# Altium PCB ArduinoShieldADC.PcbDoc
Units mil, origin at the board's own origin, x right, y up, seen from the top; angles counter-clockwise.
Board outline 3560 x 2100 mil, 2 copper layers (Component Side, Bottom Layer), stack 12.8 mil thick; 44 components, 42 nets, 247 pads, 7 vias.
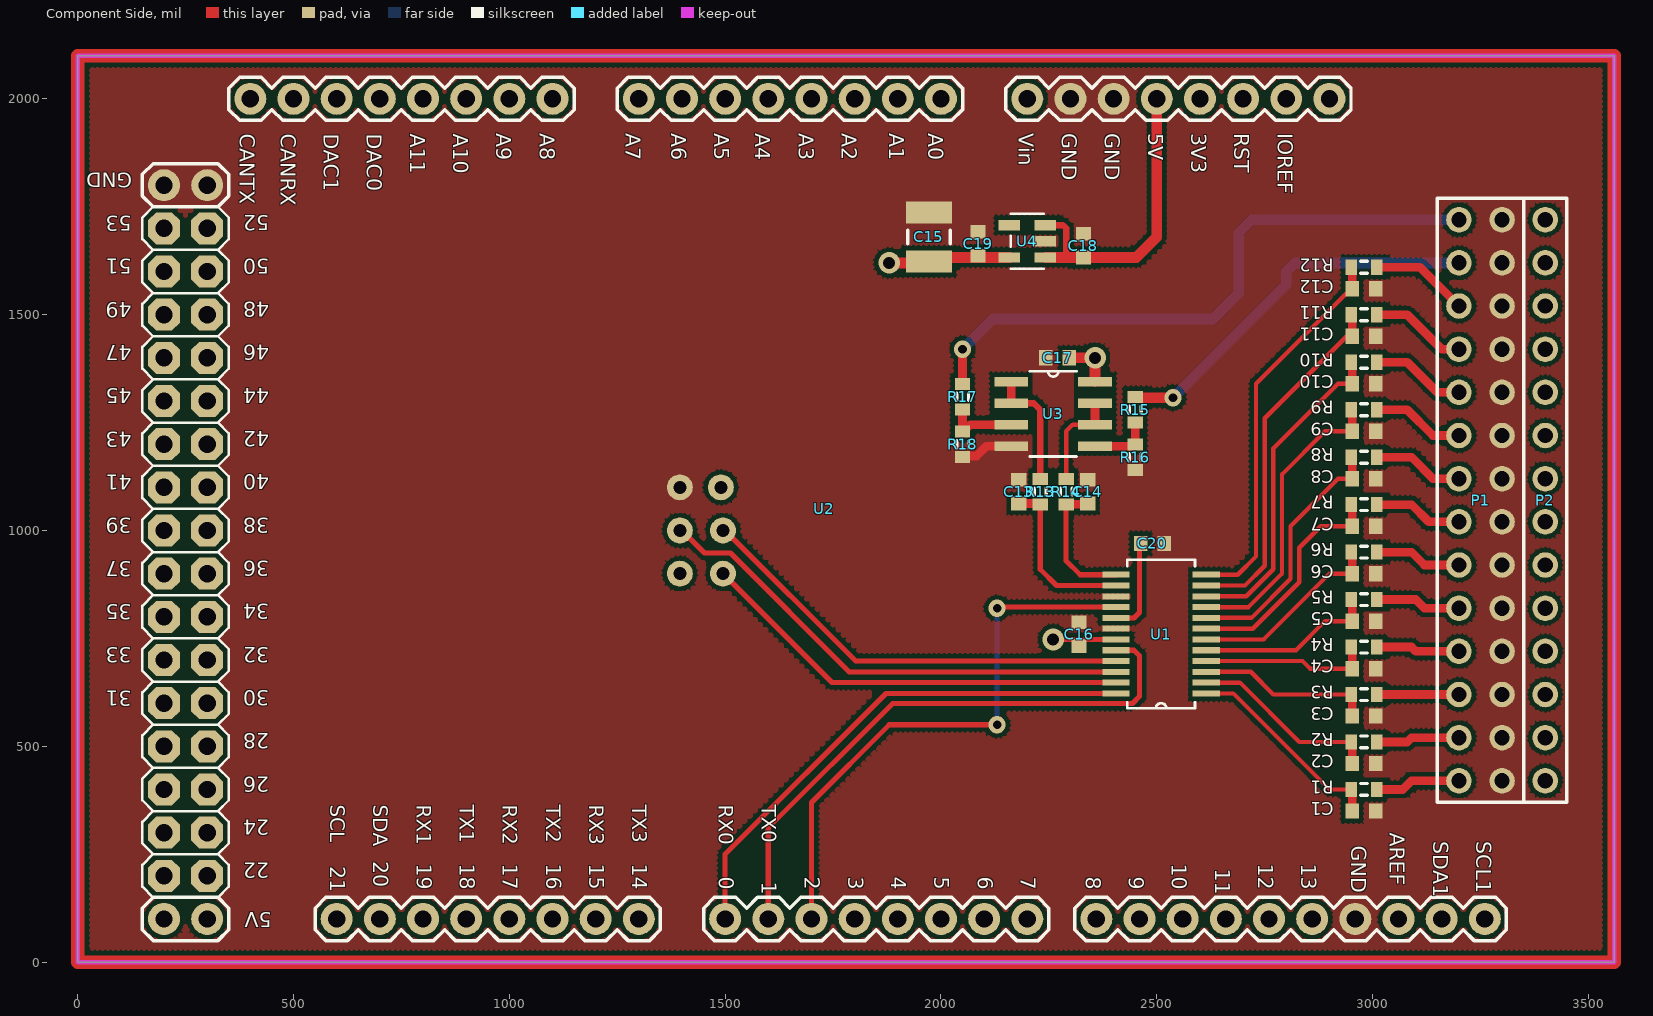
[diagram p0: Component Side view]
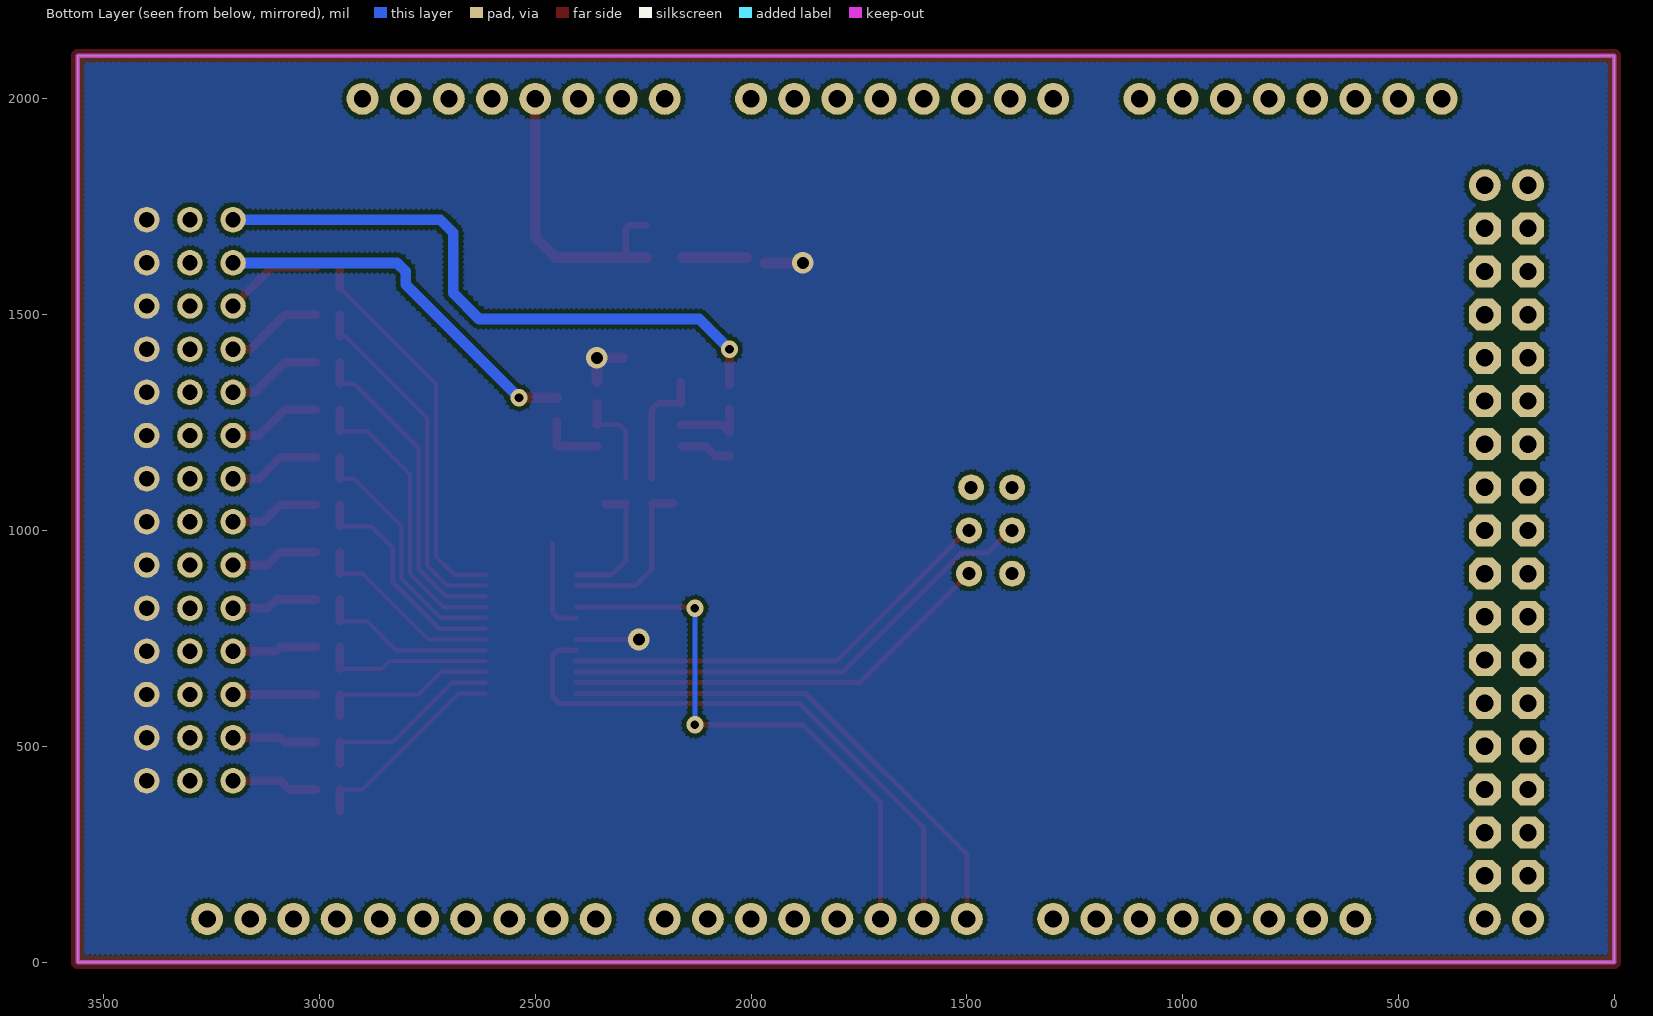
[diagram p1: Bottom Layer view, seen from below]

## Layer stack, top to bottom
Top Solder: solder mask 0.4, Solder Resist, Dk 3.5
Component Side: signal copper 1.4
Dielectric 1: core 10, FR-4, Dk 4.2
Bottom Layer: signal copper 1.4
Solder Side: solder mask 0.4, Solder Resist, Dk 3.5

## Board outline
0,0 0,2100 3560,2100 3560,0

## Design rules (kind name [scope] priority, off if disabled: settings)
Clearance [All] p1: gap=10
PolygonConnect PolygonConnect_2 [All vs IsNamedPolygon('GND pour')] p1: connectstyle=Direct reliefconductorwidth=10 reliefentries=4 polygonreliefangle="90 Angle" airgapwidth=10
PolygonConnect PolygonConnect_1 [All vs IsNamedPolygon('3V3 pour')] p2: connectstyle=Direct reliefconductorwidth=10 reliefentries=4 polygonreliefangle="90 Angle" airgapwidth=10
PolygonConnect [All] p3: connectstyle=Direct reliefconductorwidth=10 reliefentries=4 polygonreliefangle="90 Angle" airgapwidth=10
RoutingVias [All] p1: holewidth=28 width=50 viastyle="Through Hole" minholewidth=28 minwidth=50 maxholewidth=28 maxwidth=50
SolderMaskExpansion [All] p1: expansion=4
Width [All] p1: maxlimit=35 minlimit=10 preferedwidth=25 minimp=50.000000 maximp=50.000000 favimp=50.000000
30 further rules are at their usual default settings.

## Components (designator, comment, footprint, x,y, rotation, side; value= is the part's Value field where it differs from the comment)
C1 "Cap Semi" 1608[0603] 2980,350 r180 top
C2 "Cap Semi" 1608[0603] 2980,460 r180 top
C3 "Cap Semi" 1608[0603] 2980,570 r180 top
C4 "Cap Semi" 1608[0603] 2980,680 r180 top
C5 "Cap Semi" 1608[0603] 2980,790 r180 top
C6 "Cap Semi" 1608[0603] 2980,900 r180 top
C7 "Cap Semi" 1608[0603] 2980,1010 r180 top
C8 "Cap Semi" 1608[0603] 2980,1120 r180 top
C9 "Cap Semi" 1608[0603] 2980,1230 r180 top
C10 "Cap Semi" 1608[0603] 2980,1340 r180 top
C11 "Cap Semi" 1608[0603] 2980,1450 r180 top
C12 "Cap Semi" 1608[0603] 2980,1560 r180 top
C13 "Cap Semi" 1608[0603] 2180,1090 r270 top
C14 "Cap Semi" 1608[0603] 2340,1090 r270 top
C15 "Cap Semi" C1210_N 1972,1680 r270 top
C16 "Cap Semi" 1608[0603] 2320,760 r270 top
C17 "Cap Semi" 1608[0603] 2270,1400 r0 top
C18 "Cap Semi" 1608[0603] 2330,1660 r90 top
C19 "Cap Semi" 1608[0603] 2086,1664.19 r90 top
C20 "Cap Semi" 1608[0603] 2490,970 r180 top
P1 "Header 14X2A" HDR2X14_CEN 3300,420 r90 top
P2 "Header 14" HDR1X14 3400,420 r90 top
R1 "Res Semi" J1-0603 2980,400 r0 top
R2 "Res Semi" J1-0603 2980,510 r0 top
R3 "Res Semi" J1-0603 2980,620 r0 top
R4 "Res Semi" J1-0603 2980,730 r0 top
R5 "Res Semi" J1-0603 2980,840 r0 top
R6 "Res Semi" J1-0603 2980,950 r0 top
R7 "Res Semi" J1-0603 2980,1060 r0 top
R8 "Res Semi" J1-0603 2980,1170 r0 top
R9 "Res Semi" J1-0603 2980,1280 r0 top
R10 "Res Semi" J1-0603 2980,1390 r0 top
R11 "Res Semi" J1-0603 2980,1500 r0 top
R12 "Res Semi" J1-0603 2980,1610 r0 top
R13 "Res Semi" J1-0603 2230,1090 r90 top
R14 "Res Semi" J1-0603 2290,1090 r90 top
R15 "Res Semi" J1-0603 2450,1280 r90 top
R16 "Res Semi" J1-0603 2450,1170 r90 top
R17 "Res Semi" J1-0603 2050,1310 r90 top
R18 "Res Semi" J1-0603 2050,1200 r90 top
U1 "MAX11633EEG+" 21-0055H_24 2510,760 r180 top
U2 "Arduino Mega board footprint" ARDUINO_MEGA-PRO-3.3V 3550,2100 r180 top locked
U3 "OPA2364_D_8" D8 2260,1270 r0 top
U4 "ADP3309ARTZ-3.3-" RJ_5-M 2200,1670 r180 top

## Footprints (in the part's own frame and the unit in brackets; to place one, negate y for a bottom-side part, rotate by r counter-clockwise, add the part's x,y. Pads: shape width x height; smd on the part's side, far side on the other; paste and mask are expansions set on the pad)
21-0055H_24 [mil]
  rect 63x14 smd: 1(-104.5,137.5) 2(-104.5,112.5) 3(-104.5,87.5) 4(-104.5,62.5) 5(-104.5,37.5) 6(-104.5,12.5) 7(-104.5,-12.5) 8(-104.5,-37.5) 9(-104.5,-62.5) 10(-104.5,-87.5) 11(-104.5,-112.5) 12(-104.5,-137.5) 13(104.5,-137.5) 14(104.5,-112.5) 15(104.5,-87.5) 16(104.5,-62.5) 17(104.5,-37.5) 18(104.5,-12.5) 19(104.5,12.5) 20(104.5,37.5) 21(104.5,62.5) 22(104.5,87.5) 23(104.5,112.5) 24(104.5,137.5)
  silkscreen extent -79,-172 79,172, body extent -119,-172 119,172, height 69
1608[0603] [mm] "Chip Capacitor, Body 1.6x0.8mm, IPC High Density"
  rect 0.8x0.9 smd: 1(-0.7,0) 2(0.7,0)
  body extent -0.8,-0.4 0.8,0.4, height 0.78
ARDUINO_MEGA-PRO-3.3V [mil]
  round 74 hole 40: 0(2050,2000) 1(1950,2000) 2(1850,2000) 3(1750,2000) 3.3V(950,100) 4(1650,2000) 5(1550,2000) 5V@0(1050,100) 5V@1(3250,2000) 5V@2(3350,2000) 6(1450,2000) 7(1350,2000) 8(1190,2000) 9(1090,2000) 10(990,2000) 11(890,2000) 12(790,2000) 13(690,2000) 14(2250,2000) 15(2350,2000) 16(2450,2000) 17(2550,2000) 18(2650,2000) 19(2750,2000) 20(2850,2000) 21(2950,2000) A0(1550,100) A1(1650,100) A2(1750,100) A3(1850,100) A4(1950,100) A5(2050,100) A6(2150,100) A7(2250,100) A8(2450,100) A9(2550,100) A10(2650,100) A11(2750,100) A12(2850,100) A13(2950,100) A14(3050,100) A15(3150,100) AREF(490,2000) GND@0(1150,100) GND@1(1250,100) GND@2(3250,300) GND@3(3350,300) GND@4(590,2000) IOREF(750,100) RESET(850,100) SCL1(290,2000) SDA1(390,2000) VIN(1350,100) ""(650,100)
  round 60 hole 30: 5V@3(2155,1200) GND@5(2155,1000) MISO(2055,1200) MOSI(2155,1100) RST(2060,1000) SCLK(2055,1100)
  oct 74x74 hole 40: 22(3250,1900) 23(3350,1900) 24(3250,1800) 25(3350,1800) 26(3250,1700) 27(3350,1700) 28(3250,1600) 29(3350,1600) 30(3250,1500) 31(3350,1500) 32(3250,1400) 33(3350,1400) 34(3250,1300) 35(3350,1300) 36(3250,1200) 37(3350,1200) 38(3250,1100) 39(3350,1100) 40(3250,1000) 41(3350,1000) 42(3250,900) 43(3350,900) 44(3250,800) 45(3350,800) 46(3250,700) 47(3350,700) 48(3250,600) 49(3350,600) 50(3250,500) 51(3350,500) 52(3250,400) 53(3350,400)
  silkscreen extent 240,50 3400,2050, body extent 240,50 3400,2050, height 108
C1210_N [mm] "Chip Capacitor, Body 3.2x2.5mm, IPC Medium Density"
  rect 1.3x2.7 smd: 1(-1.45,0) 2(1.45,0)
  silkscreen extent -0.4,-1.25 0.4,1.25, body extent -2.49,-1.5 2.51,1.5, height 2.11
D8 [mil]
  rect 78x22 smd: 1(-97,75) 2(-97,25) 3(-97,-25) 4(-97,-75) 5(97,-75) 6(97,-25) 7(97,25) 8(97,75)
  silkscreen extent -54,-98 54,98, body extent -110,-96 117,96, height 57
HDR1X14 [mm] "Connector; Header; 14 Position"
  round 1.5 hole 0.9: 1(0,0) 2(2.54,0) 3(5.08,0) 4(7.62,0) 5(10.16,0) 6(12.7,0) 7(15.24,0) 8(17.78,0) 9(20.32,0) 10(22.86,0) 11(25.4,0) 12(27.94,0) 13(30.48,0) 14(33.02,0)
  silkscreen extent -1.27,-1.27 34.29,1.27, body extent -1.27,-1.27 34.29,1.27, height 9.27
HDR2X14_CEN [mm] "Connector; Header; 14x2 Position"
  round 1.5 hole 0.9: 1(0,0) 2(2.54,0) 3(5.08,0) 4(7.62,0) 5(10.16,0) 6(12.7,0) 7(15.24,0) 8(17.78,0) 9(20.32,0) 10(22.86,0) 11(25.4,0) 12(27.94,0) 13(30.48,0) 14(33.02,0) 15(0,2.54) 16(2.54,2.54) 17(5.08,2.54) 18(7.62,2.54) 19(10.16,2.54) 20(12.7,2.54) 21(15.24,2.54) 22(17.78,2.54) 23(20.32,2.54) 24(22.86,2.54) 25(25.4,2.54) 26(27.94,2.54) 27(30.48,2.54) 28(33.02,2.54)
  silkscreen extent -1.27,-1.27 34.29,3.81, body extent -1.27,-1.4 34.29,3.68, height 9.3
J1-0603 [mm] "Chip Resistor, Body 1.6x0.8mm, IPC High Density"
  rect 0.7x0.9 smd: 1(-0.75,0) 2(0.75,0)
  silkscreen extent -0.2,-0.35 0.2,0.35, body extent -0.8,-0.4 0.8,0.4, height 0.45
RJ_5-M [mil]
  rect 50x24 smd: 1(-41.5,37.4) 2(-41.5,0) 3(-41.5,-37.4) 4(41.5,-37.4) 5(41.5,37.4)
  silkscreen extent -39,-64 39,64, body extent -60,-59 60,59, height 57

## Part data
C1 C2 C3 C4 C5 C6 C7 C8 C9 C10 C11 C12 C13 C14 C15 C16 C17 C18 C19 C20: "Capacitor (Semiconductor SIM Model)"
P1: "Header, 14-Pin, Dual row"
P2: "Header, 14-Pin"
R1 R2 R3 R4 R5 R6 R7 R8 R9 R10 R11 R12 R13 R14 R15 R16 R17 R18: "Semiconductor Resistor"
U1 U3 U4: "Imported"
U2: library part ARDUINO-MEGAPRO

## Via types
v1: diameter 40, hole 20, Component Side to Bottom Layer, 4 vias
v2: diameter 50, hole 28, Component Side to Bottom Layer, 3 vias

## Nets (pads, with @x,y where several pads share a name; then routed paths per layer and width w, separated by ;. In a path a pad name is that pad's centre, name@x,y a point inside that pad or via, vN(x,y) a via of type N, cw(c..) or ccw(c..) an arc to the next point about the centre after c; other vN are vias at no path point)
3V3: C15.2 C16.2 C17.2 C19.1 P2.1 P2.2 P2.3 P2.4 P2.5 P2.6 P2.7 P2.8 P2.9 P2.10 P2.11 P2.12 P2.13 P2.14 U1.19 U3.8 U4.5 | length 495.8
  Component Side w12: v2(2260,747.5) U1.19
  Component Side w25: v2(1880,1620) C15.2@1967.4,1620 ; C15.2@2010,1632.6 U4.5 ; C17.2 v2(2357,1400) U3.8
3V3_I: P1.25 R11.2 | length 225.6
  Component Side w20: R11.2@3007.56,1500 3080,1500 3160,1420 P1.25
3V3_V: P1.28 R17.2 | length 1438.7
  Component Side w20: R17.2@2050,1337.56 v1(2050,1420)
  Bottom Layer w25: v1(2050,1420) 2120,1490 2630,1490 2690,1550 2690,1690 2720,1720 P1.28
5V: C18.1 U2.5V@0 U4.1 U4.3 | length 717.1
  Component Side w15: U4.3 2282.6,1707.4 2290,1700 2290,1632.6
  Component Side w25: U4.1 2452.6,1632.6 2500,1680 2500,2000
12V_I: P1.26 R12.2 | length 229.7
  Component Side w20: R12.2@3007.56,1610 3110,1610 P1.26
12V_V: P1.27 R15.2 | length 897
  Component Side w25: R15.2@2450,1307.56 v1(2537.56,1307.56)
  Bottom Layer w25: v1(2537.56,1307.56) 2800,1570 2800,1600 2820,1620 P1.27
A0: C1.2 R1.1 U1.1 | length 480.1
  Component Side w10: U1.1 2677.5,622.5 2900,400 R1.1@2952.44,400
  Component Side w20: C1.2 R1.1@2952.44,400
A1: C2.2 R2.1 U1.2 | length 444.9
  Component Side w10: U1.2 2692.5,647.5 2830,510 R2.1@2952.44,510
  Component Side w20: C2.2 R2.1@2952.44,510
A2: C3.2 R3.1 U1.3 | length 409.7
  Component Side w10: U1.3 2717.5,672.5 2770,620 R3.1@2952.44,620
  Component Side w20: C3.2 R3.1@2952.44,620
A3: C4.2 R4.1 U1.4 | length 395.2
  Component Side w10: U1.4 2837.5,697.5 2855,680 C4.2
  Component Side w20: C4.2 R4.1@2952.44,730
A4: C5.2 R5.1 U1.5 | length 415.9
  Component Side w10: U1.5 2822.5,722.5 2890,790 C5.2
  Component Side w20: C5.2 R5.1@2952.44,840
A5: C6.2 R6.1 U1.6 | length 451.1
  Component Side w10: U1.6 2747.5,747.5 2900,900 C6.2
  Component Side w20: C6.2 R6.1@2952.44,950
A6: C7.2 R7.1 U1.7 | length 533.2
  Component Side w10: U1.7 2722.5,772.5 2830,880 2830,960 2880,1010 C7.2
  Component Side w20: C7.2 R7.1@2952.44,1060
A7: C8.2 R8.1 U1.8 | length 592.8
  Component Side w10: U1.8 2719.22,797.5 2810,888.28 2810,1010 2920,1120 C8.2
  Component Side w20: C8.2 R8.1@2952.44,1170
A8: C9.2 R9.1 U1.9 | length 691.5
  Component Side w10: U1.9 2712.5,822.5 2790,900 2790,1130 2890,1230 C9.2
  Component Side w20: C9.2 R9.1@2952.44,1280
A9: C10.2 R10.1 U1.10 | length 756
  Component Side w10: U1.10 2707.5,847.5 2770,910 2770,1190 2920,1340 C10.2
  Component Side w20: C10.2 R10.1@2952.44,1390
A10: C11.2 R11.1 U1.11 | length 827.3
  Component Side w10: U1.11 2704.22,872.5 2750,918.28 2750,1260 2940,1450 C11.2
  Component Side w20: C11.2 R11.1@2952.44,1500
A11: C12.2 R12.1 U1.12 | length 895.2
  Component Side w10: U1.12 2687.5,897.5 2730,940 2730,1340 C12.2@2952.44,1562.44
  Component Side w20: C12.2@2952.44,1562.44 R12.1@2952.44,1610
A12: C14.2 R14.1 U1.13 | length 307.5
  Component Side w12: R14.1 2290,930 2322.5,897.5 U1.13
  Component Side w20: R14.1 C14.2@2338.03,1060.47
A13: C13.2 R13.1 U1.14 | length 392.3
  Component Side w12: R13.1@2228.03,1062.44 R13.1 2230,910 2267.5,872.5 U1.14
  Component Side w20: C13.2 R13.1@2228.03,1062.44
BANKA_I: P1.15 R1.2 | length 200.7
  Component Side w20: R1.2@3007.56,400 3070,400 3090,420 P1.15
BANKA_V: P1.16 R2.2 | length 196.6
  Component Side w20: R2.2@3007.56,510 3080,510 3090,520 P1.16
BANKB_I: P1.17 R3.2 | length 192.4
  Component Side w20: R3.2@3007.56,620 P1.17
BANKB_V: P1.18 R4.2 | length 196.6
  Component Side w20: R4.2@3007.56,730 3090,730 3100,720 P1.18
BANKC_I: P1.19 R5.2 | length 200.7
  Component Side w20: R5.2@3007.56,840 3100,840 3120,820 P1.19
BANKC_V: P1.20 R6.2 | length 204.9
  Component Side w20: R6.2@3007.56,950 3090,950 3120,920 P1.20
CNVST: U1.16 U2.2 | length 1321.1
  Component Side w12: U2.2 1700,370 1880,550 v1(2130,550) ; v1(2130,820) 2132.5,822.5 U1.16
  Bottom Layer w12: v1(2130,550) v1(2130,820)
CS: U1.20 U2.1 | length 1351.2
  Component Side w12: U2.1 1600,311.11 1888.39,599.5 2443.63,599.5 2460,615.87 2460,710 2447.5,722.5 U1.20
EOC: U1.24 U2.0 | length 1209.8
  Component Side w12: U2.0 1500,250 1872.5,622.5 U1.24
FPGA_I: P1.21 R7.2 | length 209
  Component Side w20: R7.2@3007.56,1060 3090,1060 3130,1020 P1.21
FPGA_V: P1.22 R8.2 | length 213.2
  Component Side w20: R8.2@3007.56,1170 3090,1170 3140,1120 P1.22
GND: C1.1 C2.1 C3.1 C4.1 C5.1 C6.1 C7.1 C8.1 C9.1 C10.1 C11.1 C12.1 C13.1 C14.1 C15.1 C16.1 C17.1 C18.2 C19.2 C20.1 P1.1 P1.2 P1.3 P1.4 P1.5 P1.6 P1.7 P1.8 P1.9 P1.10 P1.11 P1.12 P1.13 P1.14 R16.1 R18.1 U1.15 U1.18 U2.GND@0 U2.GND@1 U2.GND@2 U2.GND@3 U2.GND@4 U2.GND@5 U3.4 U4.2 | length 119.3
  Component Side w20: R18.1@2050,1172.44 2082.44,1172.44 2105,1195 U3.4@2160,1195
MISO: U1.23 U2.MISO | length 1015.1
  Component Side w12: U2.MISO 1747.5,647.5 U1.23
MOSI: U1.22 U2.MOSI | length 1141.2
  Component Side w12: U2.MOSI@1400,1000 1452.5,947.5 1512.55,947.5 1787.55,672.5 U1.22
NetC20_2: C20.2 U1.17 | length 219.7
  Component Side w12: U1.17 2447.5,797.5 2460,810 C20.2@2460,970
NetR13_2: R13.2 U3.1 U3.2 | length 283.7
  Component Side w15: U3.2 2215,1295 2230,1280 R13.2
  Component Side w20: U3.2 U3.1
NetR14_2: R14.2 U3.6 U3.7 | length 233.7
  Component Side w10: R14.2 2290,1230 2305,1245 U3.6
  Component Side w20: U3.6 U3.7
NetR15_1: R15.1 R16.2 U3.5 | length 145.3
  Component Side w20: U3.5 R16.2@2447.44,1195 ; R16.2@2450,1197.56 R15.1@2450,1252.44
NetR17_1: R17.1 R18.2 U3.3 | length 175.1
  Component Side w20: R17.1@2050,1282.44 2050,1227.56 2067.44,1245 U3.3
SCLK: U1.21 U2.SCLK | length 1030.8
  Component Side w12: U2.SCLK@1500,1000 1802.5,697.5 U1.21
SDRAM_I: P1.23 R9.2 | length 217.3
  Component Side w20: R9.2@3007.56,1280 3080,1280 3140,1220 P1.23
SDRAM_V: P1.24 R10.2 | length 221.4
  Component Side w20: R10.2@3007.56,1390 3080,1390 3150,1320 P1.24
pads on no net: U2. U2.3 U2.3.3V U2.4 U2.5 U2.5V@1 U2.5V@2 U2.5V@3 U2.6 U2.7 U2.8 U2.9 U2.10 U2.11 U2.12 U2.13 U2.14 U2.15 U2.16 U2.17 U2.18 U2.19 U2.20 U2.21 U2.22 U2.23 U2.24 U2.25 U2.26 U2.27 U2.28 U2.29 U2.30 U2.31 U2.32 U2.33 U2.34 U2.35 U2.36 U2.37 U2.38 U2.39 U2.40 U2.41 U2.42 U2.43 U2.44 U2.45 U2.46 U2.47 U2.48 U2.49 U2.50 U2.51 U2.52 U2.53 U2.A0 U2.A1 U2.A2 U2.A3 U2.A4 U2.A5 U2.A6 U2.A7 U2.A8 U2.A9 U2.A10 U2.A11 U2.A12 U2.A13 U2.A14 U2.A15 U2.AREF U2.IOREF U2.RESET U2.RST U2.SCL1 U2.SDA1 U2.VIN U4.4
copper on no net: | length 11320
  Component Side w31.5: 0,0 3560,0 3560,2100 0,2100 0,0

## Polygon pours and split planes (outlines as drawn)
3V3 on Bottom Layer "3V3 pour" (hatched 90Degree grid 12 track 12, remove dead copper, pour order 4): 0,2100 3560,2100 3560,0 0,0
GND on Component Side "GND pour" (hatched 90Degree grid 12 track 12, remove dead copper, pour order 2): 0,2100 3560,2100 3560,0 0,0

## Keep-outs
Keep-Out Layer:
  the board outline again, w10

## Silkscreen, mask and mechanical layers (free items; w line width, h text height)
Top Solder:
  text "CANTX" at 380,1920 h35 r270
  text "CANRX" at 470,1920 h35 r270
  text "DAC1" at 570,1920 h35 r270
  text "DAC0" at 670,1920 h35 r270
  text "A11" at 770,1920 h35 r270
  text "A10" at 870,1920 h35 r270
  text "A9" at 970,1920 h35 r270
  text "A8" at 1070,1920 h35 r270
  text "A7" at 1270,1920 h35 r270
  text "A6" at 1380,1920 h35 r270
  text "A5" at 1480,1920 h35 r270
  text "A4" at 1570,1920 h35 r270
  text "A3" at 1670,1920 h35 r270
  text "A2" at 1770,1920 h35 r270
  text "A1" at 1880,1920 h35 r270
  text "A0" at 1970,1920 h35 r270
  text "Vin" at 2180,1920 h35 r270
  text "GND" at 2280,1920 h35 r270
  text "GND" at 2380,1920 h35 r270
  text "GND" at 2380,1920 h35 r270
  text "5V" at 2480,1920 h35 r270
  text "3V3" at 2580,1920 h35 r270
  text "RST" at 2680,1920 h35 r270
  text "IOREF" at 2780,1920 h35 r270
  text "GND" at 130,1830 h35 r180
  text "V/I" at 3220,1800 h40 r90
  text "GND" at 3320,1800 h40 r90
  text "3V3" at 3420,1800 h40 r90
  text "53" at 120,1730 h35 r180
  text "52" at 440,1730 h35 r180
  text "51" at 120,1630 h35 r180
  text "50" at 440,1630 h35 r180
  text "49" at 120,1530 h35 r180
  text "48" at 440,1530 h35 r180
  text "47" at 120,1430 h35 r180
  text "46" at 440,1430 h35 r180
  text "45" at 120,1330 h35 r180
  text "44" at 440,1330 h35 r180
  text "43" at 120,1230 h35 r180
  text "42" at 440,1230 h35 r180
  text "41" at 120,1130 h35 r180
  text "40" at 440,1130 h35 r180
  text "GND" at 1240,1080 h35
  text "RST" at 1560,1080 h35
  text "39" at 120,1030 h35 r180
  text "38" at 440,1030 h35 r180
  text "MOSI" at 1220,980 h35
  text "SCLK" at 1560,980 h35
  text "37" at 120,930 h35 r180
  text "36" at 440,930 h35 r180
  text "5V" at 1270,880 h35
  text "MISO" at 1560,880 h35
  text "35" at 120,830 h35 r180
  text "34" at 440,830 h35 r180
  text "33" at 120,730 h35 r180
  text "32" at 440,730 h35 r180
  text "31" at 120,630 h35 r180
  text "30" at 440,630 h35 r180
  text "29" at 120,530 h35 r180
  text "28" at 440,530 h35 r180
  text "27" at 120,430 h35 r180
  text "26" at 440,430 h35 r180
  text "SCL" at 580,370 h35 r270
  text "SDA" at 680,370 h35 r270
  text "RX1" at 780,370 h35 r270
  text "TX1" at 880,370 h35 r270
  text "RX2" at 980,370 h35 r270
  text "TX2" at 1080,370 h35 r270
  text "RX3" at 1180,370 h35 r270
  text "TX3" at 1280,370 h35 r270
  text "RX0" at 1480,370 h35 r270
  text "TX0" at 1580,370 h35 r270
  text "25" at 120,330 h35 r180
  text "24" at 440,330 h35 r180
  text "AREF" at 3040,300 h35 r270
  text "SDA1" at 3140,280 h35 r270
  text "SCL1" at 3240,280 h35 r270
  text "GND" at 2950,270 h35 r270
  text "23" at 120,230 h35 r180
  text "22" at 440,230 h35 r180
  text "20" at 680,230 h35 r270
  text "19" at 780,230 h35 r270
  text "18" at 880,230 h35 r270
  text "17" at 980,230 h35 r270
  text "16" at 1080,230 h35 r270
  text "15" at 1180,230 h35 r270
  text "14" at 1280,230 h35 r270
  text "10" at 2530,230 h35 r270
  text "12" at 2730,230 h35 r270
  text "13" at 2830,230 h35 r270
  text "21" at 580,220 h35 r270
  text "11" at 2630,220 h35 r270
  text "0" at 1480,200 h35 r270
  text "2" at 1680,200 h35 r270
  text "3" at 1780,200 h35 r270
  text "4" at 1880,200 h35 r270
  text "5" at 1980,200 h35 r270
  text "6" at 2080,200 h35 r270
  text "7" at 2180,200 h35 r270
  text "8" at 2330,200 h35 r270
  text "9" at 2430,200 h35 r270
  text "1" at 1580,190 h35 r270
  text "5V" at 120,130 h35 r180
  text "5V" at 440,130 h35 r180

## Text inside footprints (layer, text, board x,y; h text height)
U2: Top Overlay "IOREF" at 2780,1920 h35 r270; Top Overlay "5V" at 450,115 h35 r180; Top Overlay "AREF" at 3040,300 h35 r270; Top Overlay "GND" at 2950,270 h35 r270; Top Overlay "Vin" at 2180,1920 h35 r270; Top Overlay "GND" at 2280,1920 h35 r270; Top Overlay "GND" at 2380,1920 h35 r270; Top Overlay "5V" at 2480,1920 h35 r270; Top Overlay "3V3" at 2580,1920 h35 r270; Top Overlay "RST" at 2680,1920 h35 r270; Top Overlay "SCL" at 585,365 h34 r270; Top Overlay "SDA" at 685,365 h34 r270; Top Overlay "RX1" at 785,365 h34 r270; Top Overlay "TX1" at 885,365 h34 r270; Top Overlay "RX2" at 985,365 h34 r270; Top Overlay "TX2" at 1085,365 h34 r270; Top Overlay "RX3" at 1185,365 h34 r270; Top Overlay "TX3" at 1285,365 h34 r270; Top Overlay "RX0" at 1485,365 h34 r270; Top Overlay "TX0" at 1585,365 h34 r270; Top Overlay "GND" at 125.9,1829 h34 r180; Top Overlay "CANTX" at 375,1919 h35 r270; Top Overlay "CANRX" at 470,1919 h35 r270; Top Overlay "DAC1" at 570,1919 h35 r270; Top Overlay "DAC0" at 670,1919 h35 r270; Top Overlay "A11" at 770,1919 h35 r270; Top Overlay "A10" at 870,1919 h35 r270; Top Overlay "A9" at 970,1920 h35 r270; Top Overlay "A8" at 1070,1920 h35 r270; Top Overlay "A7" at 1270,1920 h35 r270; Top Overlay "A6" at 1375,1920 h35 r270; Top Overlay "A5" at 1475,1920 h35 r270; Top Overlay "A4" at 1570,1920 h35 r270; Top Overlay "A3" at 1670,1920 h35 r270; Top Overlay "A2" at 1770,1920 h35 r270; Top Overlay "A1" at 1880,1920 h35 r270; Top Overlay "A0" at 1970,1920 h35 r270; Top Overlay "53" at 125,1729 h35 r180; Top Overlay "51" at 125,1629 h35 r180; Top Overlay "49" at 125,1529 h35 r180; Top Overlay "47" at 125,1429 h35 r180; Top Overlay "45" at 125,1329 h35 r180; Top Overlay "43" at 125,1229 h35 r180; Top Overlay "41" at 125,1129 h35 r180; Top Overlay "39" at 125,1029 h35 r180; Top Overlay "37" at 125,929 h35 r180; Top Overlay "35" at 125,829 h35 r180; Top Overlay "33" at 125,729 h35 r180; Top Overlay "31" at 125,629 h35 r180; Top Overlay "52" at 444,1730 h35 r180; Top Overlay "48" at 444,1530 h35 r180; Top Overlay "50" at 444,1630 h35 r180; Top Overlay "46" at 444,1430 h35 r180; Top Overlay "44" at 444,1330 h35 r180; Top Overlay "42" at 444,1230 h35 r180; Top Overlay "40" at 444,1130 h35 r180; Top Overlay "38" at 444,1030 h35 r180; Top Overlay "36" at 444,930 h35 r180; Top Overlay "34" at 444,830 h35 r180; Top Overlay "32" at 444,730 h35 r180; Top Overlay "30" at 444,630 h35 r180; Top Overlay "28" at 444,530 h35 r180; Top Overlay "26" at 444,430 h35 r180; Top Overlay "24" at 444,330 h35 r180; Top Overlay "22" at 444,230 h35 r180; Top Overlay "21" at 585,221.65 h35 r270; Top Overlay "20" at 685,233.31 h35 r270; Top Overlay "19" at 785,227.48 h35 r270; Top Overlay "18" at 885,227.48 h35 r270; Top Overlay "17" at 985,227.48 h35 r270; Top Overlay "16" at 1085,227.48 h35 r270; Top Overlay "15" at 1185,227.48 h35 r270; Top Overlay "14" at 1285,227.48 h35 r270; Top Overlay "13" at 2835,227.48 h35 r270; Top Overlay "12" at 2735,227.48 h35 r270; Top Overlay "11" at 2635,215.82 h35 r270; Top Overlay "10" at 2535,227.48 h35 r270; Top Overlay "9" at 2435,198.33 h35 r270; Top Overlay "8" at 2335,198.33 h35 r270; Top Overlay "7" at 2185,198.33 h35 r270; Top Overlay "6" at 2085,198.33 h35 r270; Top Overlay "5" at 1985,198.33 h35 r270; Top Overlay "4" at 1885,198.33 h35 r270; Top Overlay "3" at 1785,198.33 h35 r270; Top Overlay "2" at 1685,198.33 h35 r270; Top Overlay "1" at 1585,186.66 h35 r270; Top Overlay "0" at 1485,198.33 h35 r270; Top Overlay "SDA1" at 3140,280 h35 r270; Top Overlay "SCL1" at 3240,280 h35 r270